# Altium PCB MainBoard.PcbDoc
Units mm, origin at the board's own origin, x right, y up, seen from the top; angles counter-clockwise.
Board outline 57.53 x 55.63 mm, 4 copper layers (Top Layer, GND, VCC, Bottom Layer), stack 0.603 mm thick; 33 components, 20 nets, 131 pads, 77 vias.
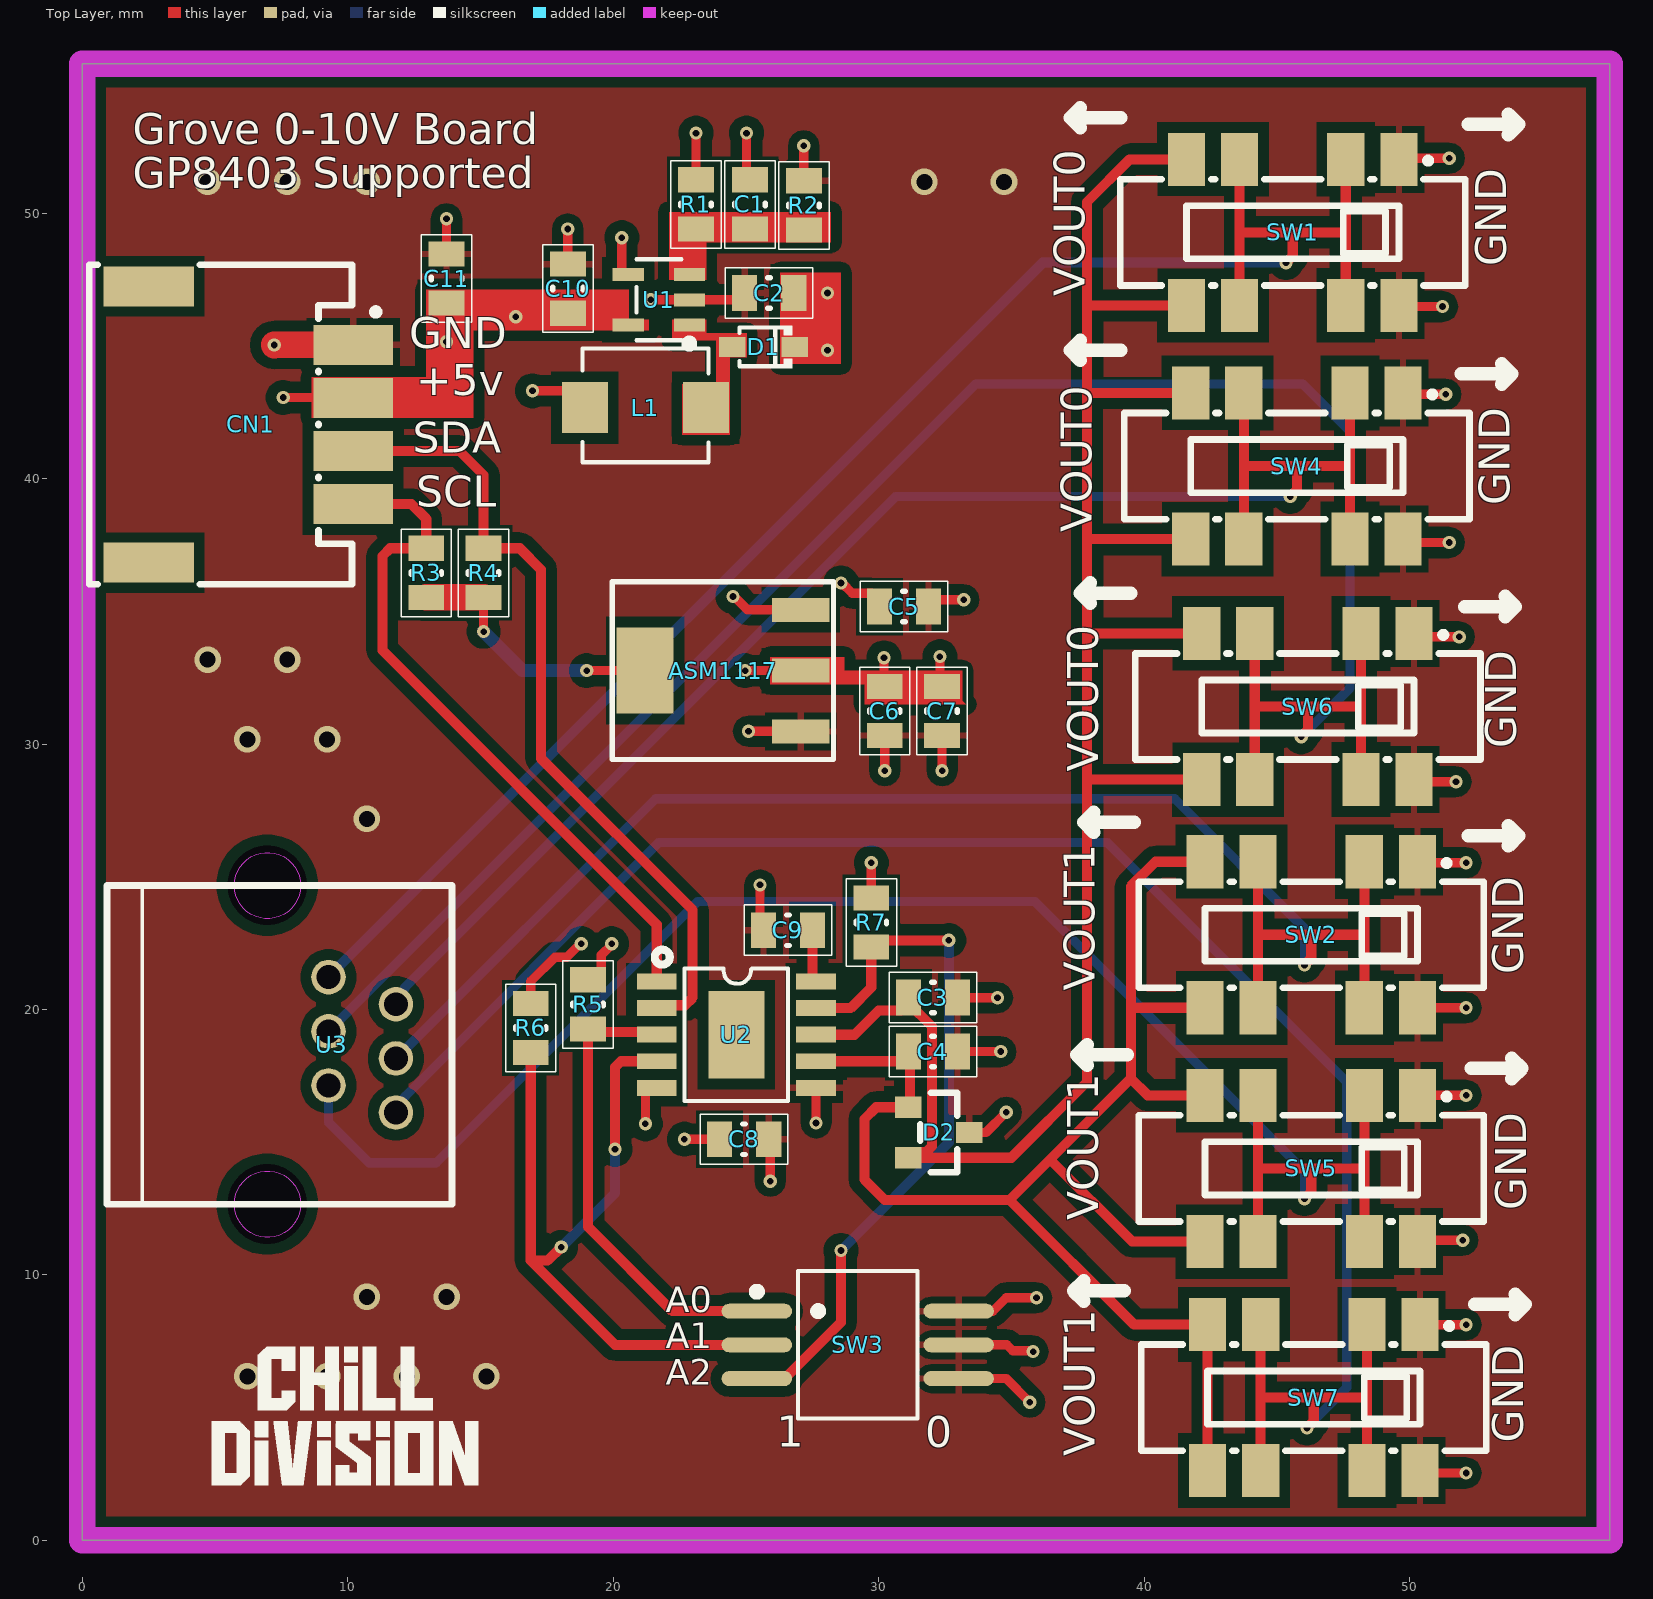
[diagram p0: Top Layer view]
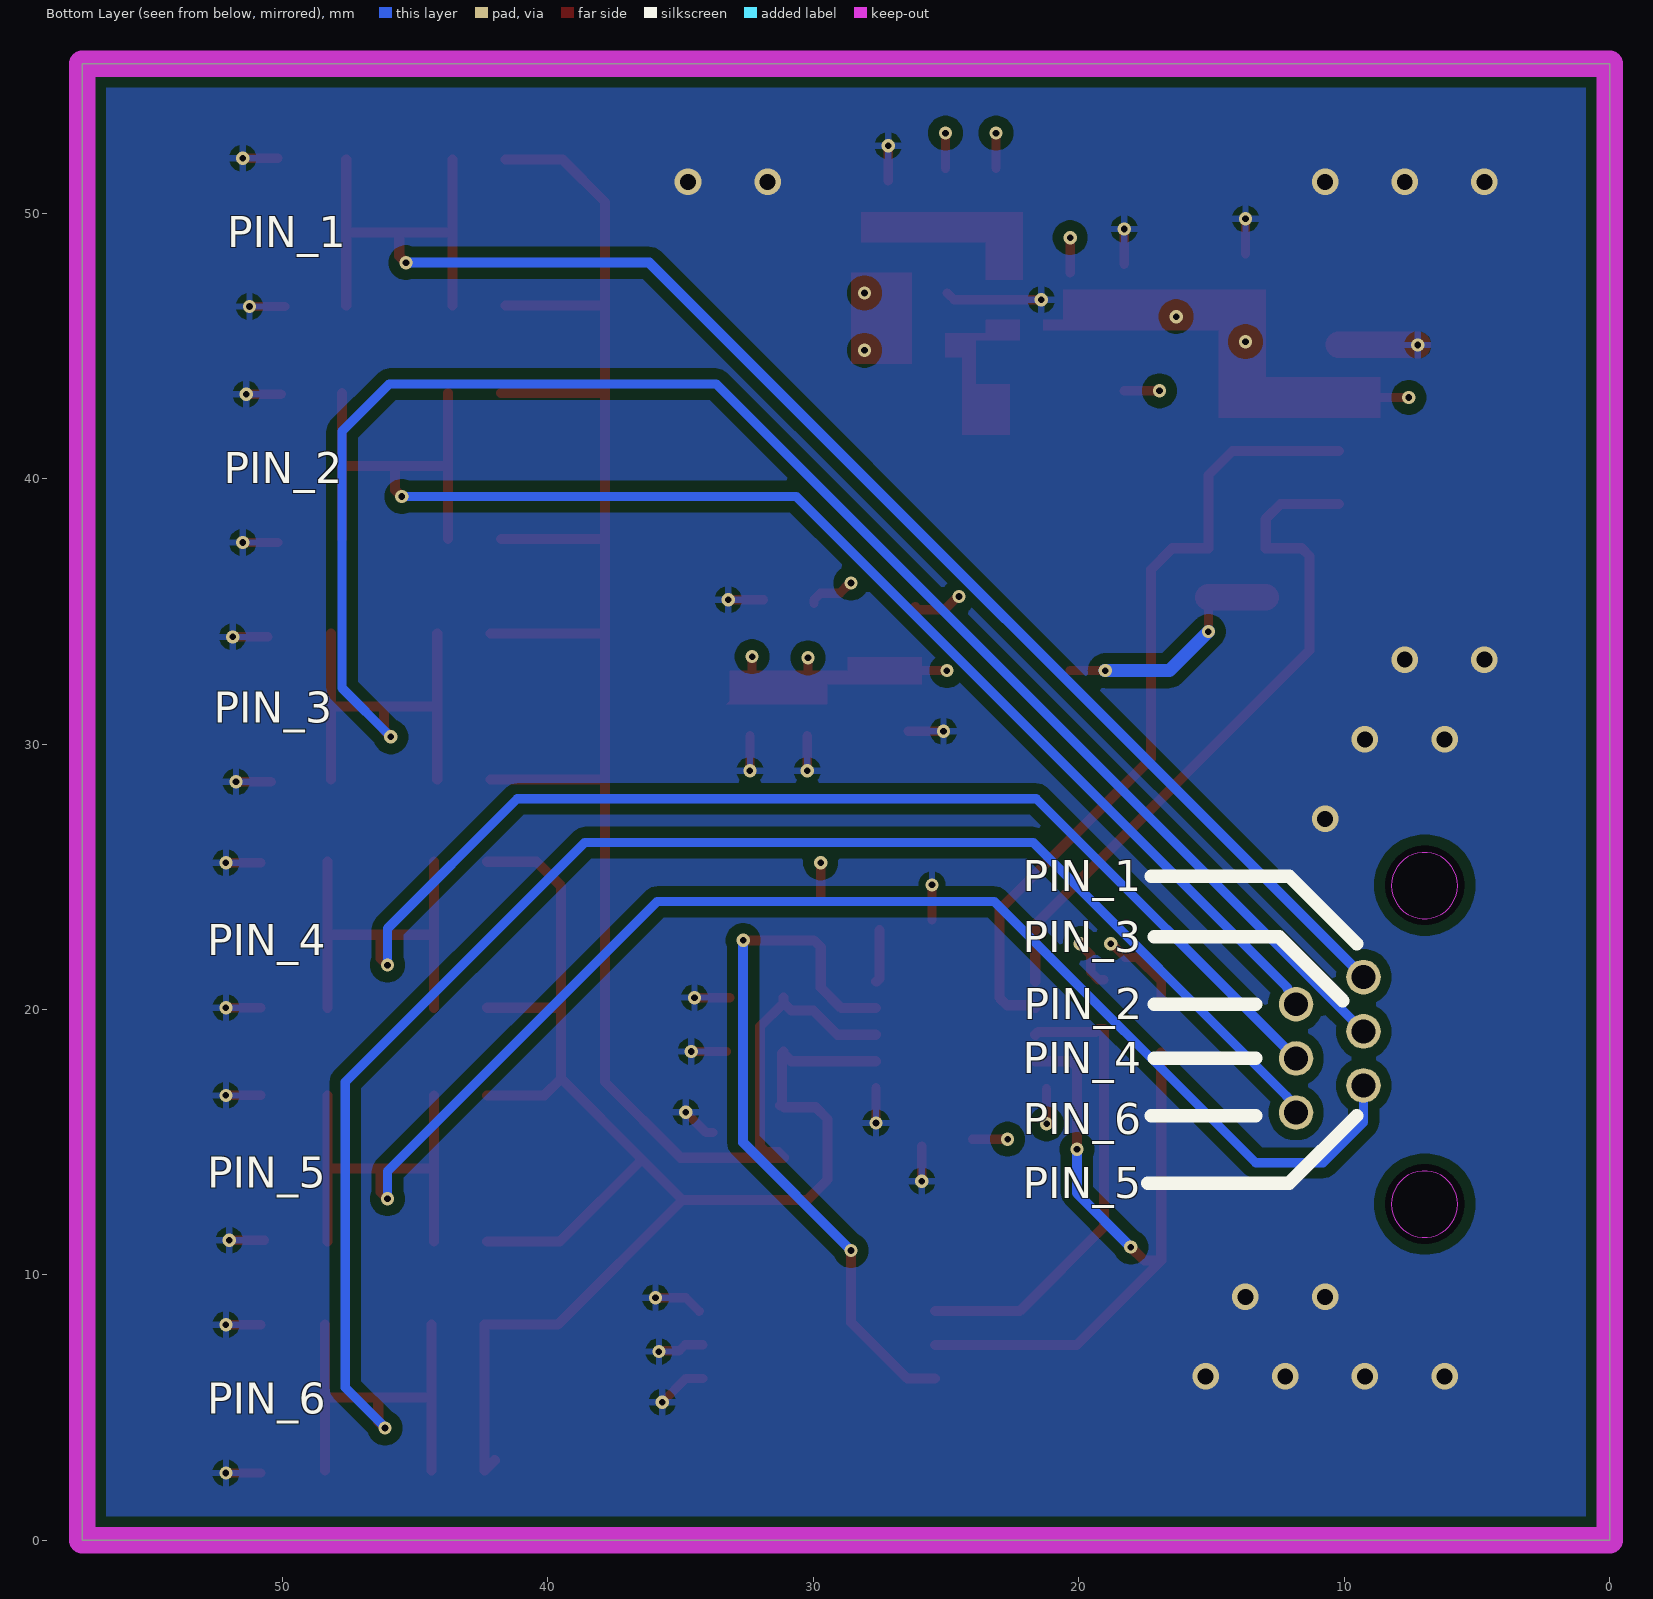
[diagram p1: Bottom Layer view, seen from below]
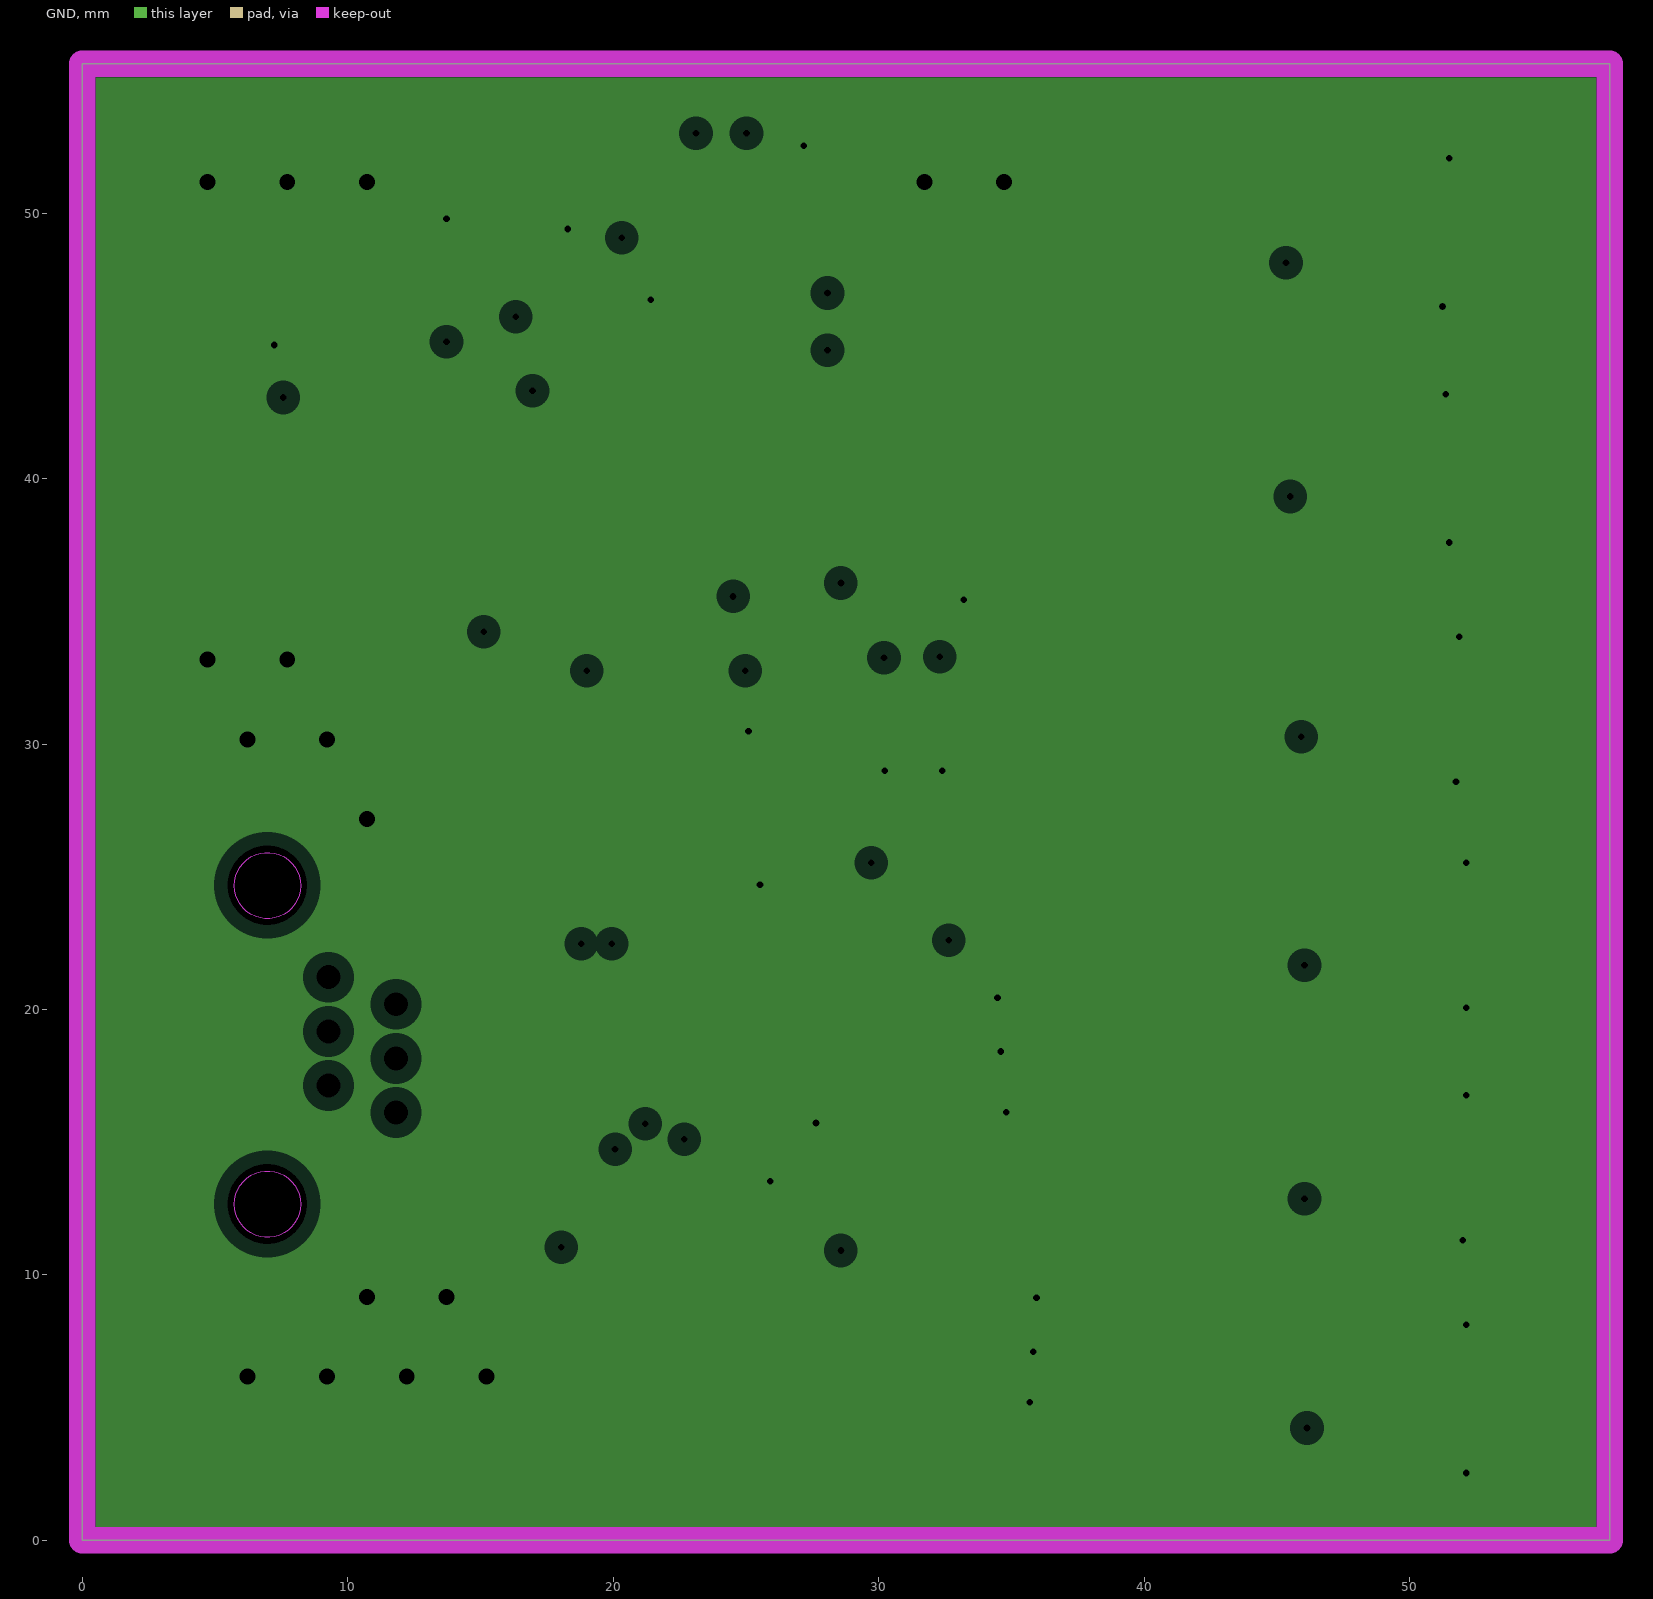
[diagram p2: GND, clearances drawn from the general rule]
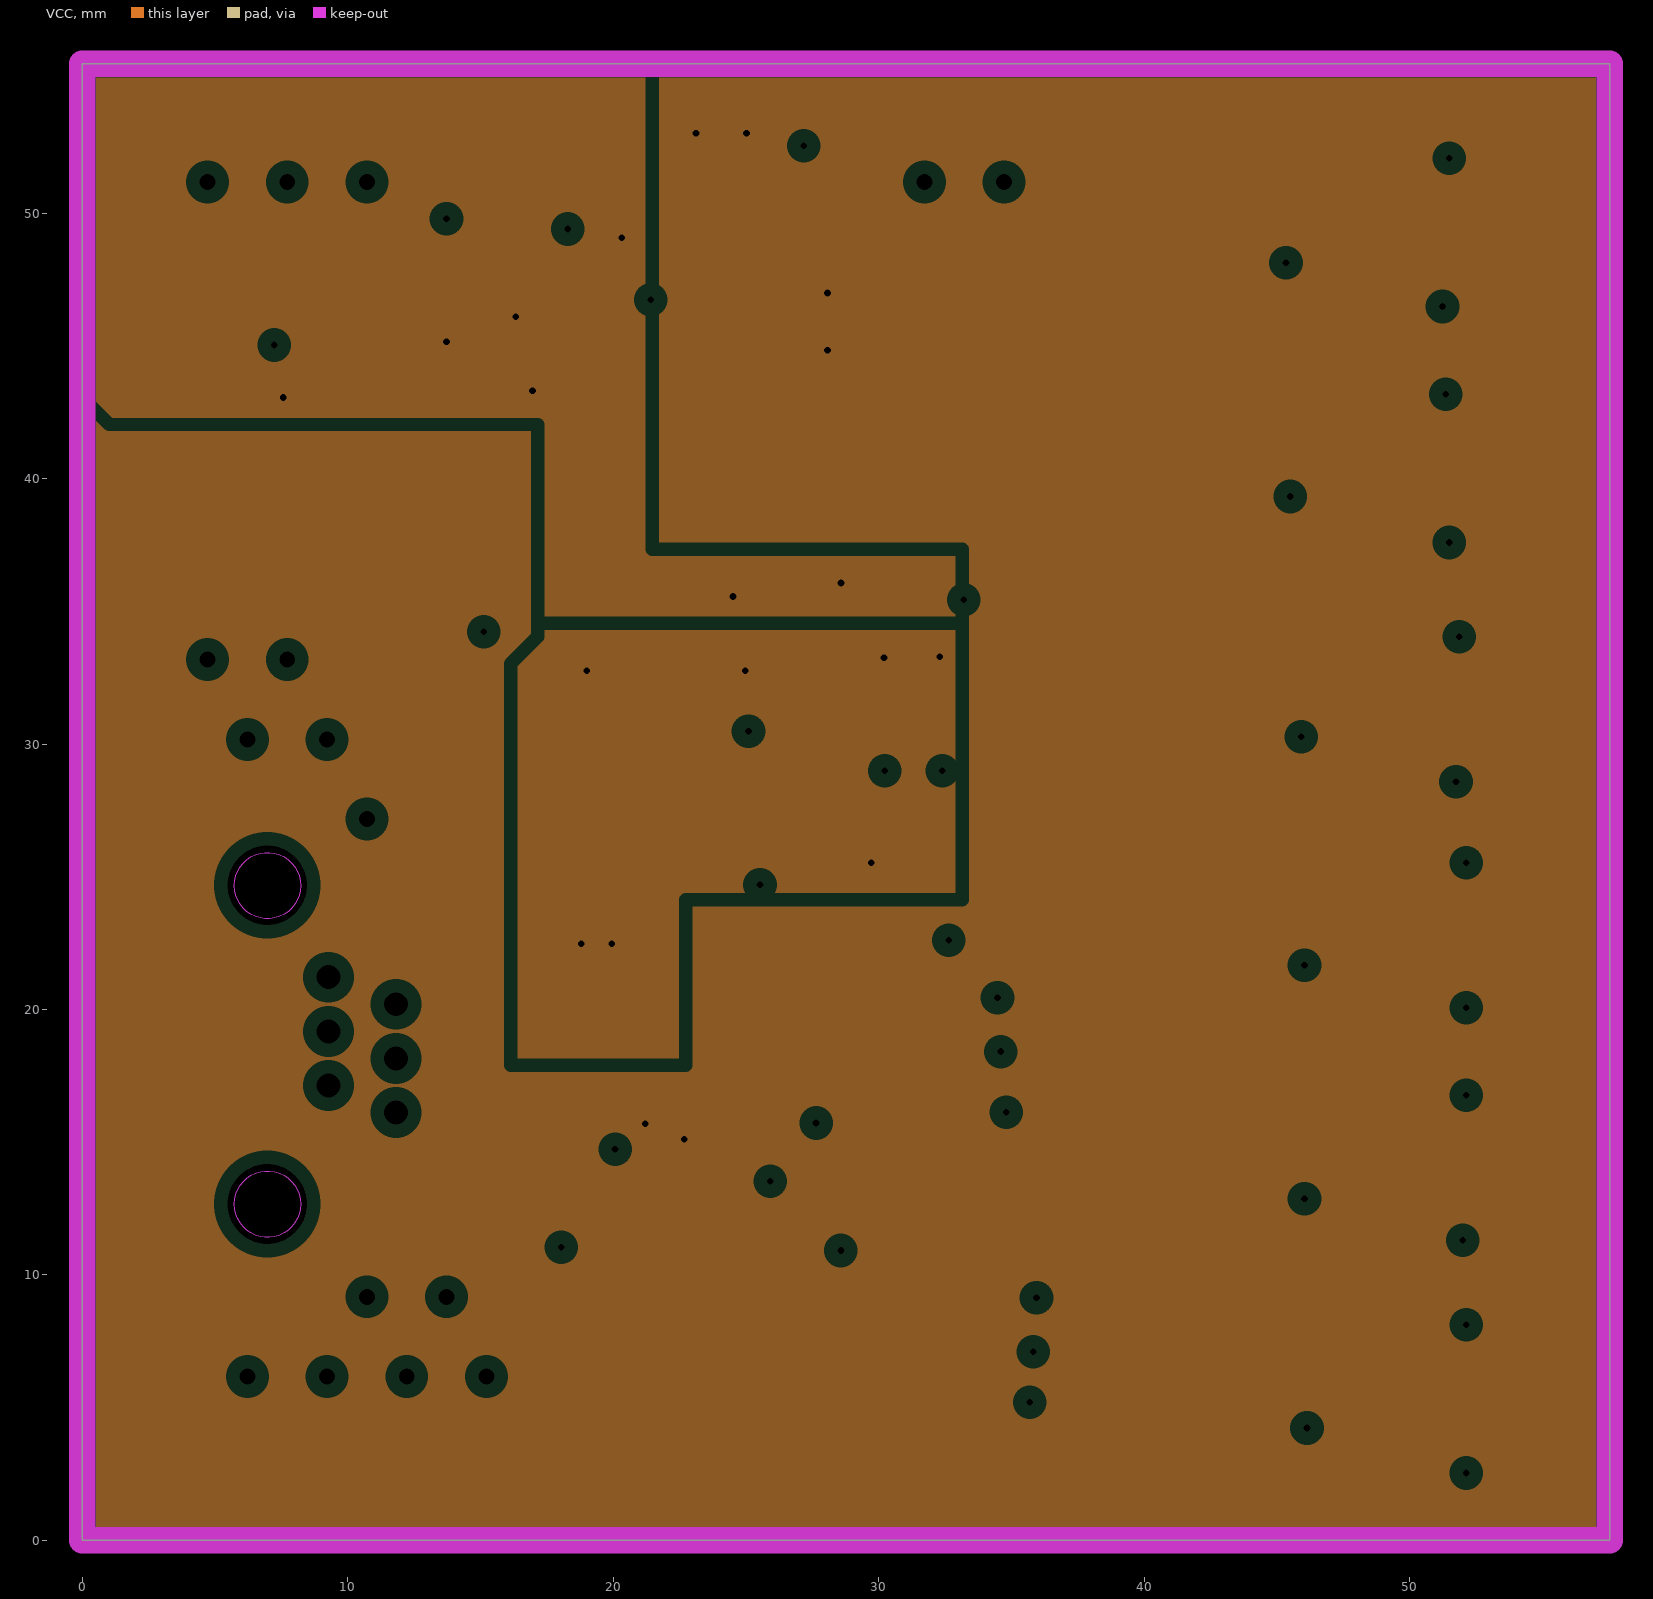
[diagram p3: VCC, clearances drawn from the general rule]

## Layer stack, top to bottom
Top Solder: solder mask 0.0102, Solder Resist, Dk 3.5
Top Layer: signal copper 0.0356
Dielectric 2: prepreg 0.0711, PP-006, Dk 4.1
GND: plane copper 0.035, net GND
Dielectric 1: dielectric 0.32, FR-4, Dk 4.8
VCC: plane copper 0.035, net (Multiple Nets)
Dielectric 3: prepreg 0.0711, PP-006, Dk 4.1
Bottom Layer: signal copper 0.0356
Bottom Solder: solder mask 0.0102, Solder Resist, Dk 3.5

## Board outline
0,0 0,55.626 57.531,55.626 57.531,0

## Design rules (kind name [scope] priority, off if disabled: settings)
Clearance [IsRegion] p1: gap=0.4 ignorepadtopadclearanceinfootprint=FALSE
ComponentClearance [All] p1: gap=0.025 collisioncheckmode=3 verticalgap=0.025 showdistances=FALSE
Height [All] p1: minheight=0.005 maxheight=127 prefheight=0.025
HoleSize [All] p1: absolutevalues=TRUE maxlimit=50.8 minlimit=0.025 maxpercent=80.000 minpercent=20.000
PlaneClearance [All] p1: clearance=0.508
PlaneConnect [All] p1: planeconnectstyle=Relief reliefexpansion=0.508 reliefentries=4 reliefconductorwidth=0.254 reliefairgap=0.254
PolygonConnect [All] p1: connectstyle=Relief reliefconductorwidth=0.254 reliefentries=4 polygonreliefangle="90 Angle" airgapwidth=0.254
RoutingVias [All] p1: holewidth=0.711 width=1.27 viastyle="Through Hole" minholewidth=0.711 minwidth=1.27 maxholewidth=0.711 maxwidth=1.27
SilkToSolderMaskClearance [IsPad] p1: minsilkscreentomaskgap=0.025 clearancetoexposedcopper=TRUE
SolderMaskExpansion [All] p1: expansion=0.102 istentingtop=FALSE
Width [All] p1: maxlimit=127 minlimit=0.254 preferedwidth=0.508
24 further rules are at their usual default settings.

## Components (designator, comment, footprint, x,y, rotation, side; value= is the part's Value field where it differs from the comment)
ASM1117 "AMS1117 - 3.3V Reg" SOT229P700X180-4N 24.13,32.766 r180 top
C1 "22pF/50V" CAPC2012X08N 27.305,49.947 r90 top
C2 "22uF/25V" CAPC2012X08N 25.491,44.831 r0 top
C3 "10uF/25V" CAPC2012X08N 32.421,22.606 r180 top
C4 "10uF/25V" CAPC2012X08N 32.421,20.574 r180 top
C5 "10uF/25V" CAPC2012X08N 31.333,37.338 r180 top
C6 "10uF/25V" CAPC2012X08N 32.385,30.861 r90 top
C7 "22uF/25V" CAPC2012X08N 34.544,30.861 r90 top
C8 "100nF/50V" CAPC2012X08N 25.309,17.272 r180 top
C9 "1uF/50V" CAPC2012X08N 26.198,20.828 r0 top
C10 "22uF/25V" CAPC2012X08N 16.129,47.534 r270 top
C11 "22uF/25V" CAPC2012X08N 11.557,47.915 r270 top
CN1 "ZX-HY2.0-4PWT" CONN-SMD_4P-P2.00_ZX-HY2.0-4PWT 6.35,42.037 r270 top
D1 "1N5819WS" SOD-323_L1.8-W1.3-LS2.5-RD 25.654,44.958 r180 top
D2 "TVS" SOT-23_L2.9-W1.3-P1.90-LS2.4-BR 32.258,15.367 r180 top
L1 "10uH" IND-SMD_L4.5-W4.5_SMMS0420 21.209,42.672 r180 top
R1 "1M" RESC2012X07N 23.114,50.328 r90 top
R2 "115K" RESC2012X07N 27.178,50.292 r270 top
R3 "10K" RESC2012X07N 12.954,36.449 r270 top
R4 "10K" RESC2012X07N 15.113,36.449 r270 top
R5 "10K" RESC2012X07N 19.05,20.193 r90 top
R6 "10K" RESC2012X07N 16.891,19.304 r90 top
R7 "10K" RESC2012X07N 29.718,23.277 r90 top
SW1 "MST23D19G2" SW-SMD_MST23D19G2 45.593,49.276 r180 top
SW2 "MST23D19G2" SW-SMD_MST23D19G2 46.291,22.816 r180 top
SW3 "DSHP03TS-S" SW-SMD_DSHP03TS-S 29.21,7.366 r270 top
SW4 "MST23D19G2" SW-SMD_MST23D19G2 45.752,40.469 r180 top
SW5 "MST23D19G2" SW-SMD_MST23D19G2 46.292,14.014 r180 top
SW6 "MST23D19G2" SW-SMD_MST23D19G2 46.164,31.413 r180 top
SW7 "MST23D19G2" SW-SMD_MST23D19G2 46.387,5.378 r180 top
U1 "TPS61040DBVR" SOT-23-5_L3.0-W1.7-P0.95-LS2.8-BL 21.717,46.736 r90 top
U2 "GP8403-TC50-EW" ESSOP-10_L4.9-W3.9-P1.00-LS6.0-BL-EP 24.638,19.05 r270 top
U3 "DS1133-S60BPX" RJ11-TH_DS1133-S60BPX 10.541,18.667 r0 top

## Footprints (in the part's own frame and the unit in brackets; to place one, negate y for a bottom-side part, rotate by r counter-clockwise, add the part's x,y. Pads: shape width x height; smd on the part's side, far side on the other; paste and mask are expansions set on the pad)
CAPC2012X08N [mm] "Chip Capacitor, 2-Leads, Body 2.00x1.25mm, IPC Medium Density"
  rect 0.95x1.35 smd: 1(-0.544,2.159) 2(1.306,2.159)
  silkscreen extent -1.27,1.21 2.03,3.11, body extent -0.76,1.38 1.39,2.93, height 0.78
CONN-SMD_4P-P2.00_ZX-HY2.0-4PWT [mm]
  rect 1.5x3 smd: 1(-3,3.85) 2(-1,3.85) 3(1,3.85) 4(3,3.85)
  rect 1.5x3.4 smd: 5(5.2,-3.85) 6(-5.2,-3.85)
  silkscreen extent -6.02,-6.1 6.02,4.83, body extent -5.97,-5.36 6.03,4.64, height 5.1
ESSOP-10_L4.9-W3.9-P1.00-LS6.0-BL-EP [mm]
  rect 0.6x1.5 smd paste+0 mask+0.05: 1(-2,-3) 2(-1,-3) 3(0,-3) 4(1,-3) 5(2,-3) 6(2,3) 7(1,3) 8(0,3) 9(-1,3) 10(-2,3)
  rect 3.3x2.1 smd paste+0 mask+0.05: 11(0,0)
  silkscreen extent -3.2,-3.08 2.5,1.95, body extent -2.44,-3 2.46,3.15, height 1.4
IND-SMD_L4.5-W4.5_SMMS0420 [mm]
  rect 1.724x1.92 smd: 1(2.278,0) 2(-2.278,0)
  silkscreen extent -2.38,-2.23 2.38,2.06, body extent -2.28,-2.11 2.17,1.95, height 1.8
RESC2012X07N [mm] "Chip Resistor, 2-Leads, Body 2.00x1.25mm, IPC Medium Density"
  rect 0.95x1.35 smd: 1(-0.925,0) 2(0.925,0)
  silkscreen extent -1.65,-0.95 1.65,0.95, body extent -1.05,-0.67 1.05,0.67, height 0.65
RJ11-TH_DS1133-S60BPX [mm]
  round 1.3 hole 0.9: 1(1.27,-2.55) 2(-1.27,-1.53) 3(1.27,-0.51) 4(-1.27,0.51) 5(1.27,1.53) 6(-1.27,2.55)
  round 1.3 hole 3: ""(-3.581,-5.994) ""(-3.581,6.02)
  Keep-Out Layer board cut-out: -2.32,-6 -2.444,-6.542 -2.791,-6.977 -3.292,-7.219 -3.848,-7.219 -4.349,-6.977 -4.696,-6.542 -4.82,-6 -4.82,-6 -4.696,-5.458 -4.349,-5.023 -3.848,-4.781 -3.292,-4.781 -2.791,-5.023 -2.444,-5.458 -2.32,-6
  Keep-Out Layer board cut-out: -2.32,6 -2.444,5.458 -2.791,5.023 -3.292,4.781 -3.848,4.781 -4.349,5.023 -4.696,5.458 -4.82,6 -4.82,6 -4.696,6.542 -4.349,6.977 -3.848,7.219 -3.292,7.219 -2.791,6.977 -2.444,6.542 -2.32,6
  silkscreen extent -9.62,-6 3.38,6, body extent -9.92,-6.4 4.28,6.4, height 14.75
SOD-323_L1.8-W1.3-LS2.5-RD [mm]
  rect 1x0.75 smd: 1(-1.173,0) 2(1.173,0)
  silkscreen extent -1.08,-0.8 0.9,0.8, body extent -1.25,-0.7 1.35,0.65, height 1.1
SOT229P700X180-4N [mm] "SOT223, 4-Leads, Body 6.50x7.00mm (avg), Pitch 2.29mm, IPC Medium Density"
  rect 2.15x0.9 smd: GND(-2.93,2.29) Vin(-2.93,-2.29) Vout(-2.93,0)
  rect 2.15x3.25 smd: Vout(2.93,0)
  silkscreen extent -4.17,-3.35 4.17,3.35, body extent -3.55,-3.28 3.45,3.22, height 1.85
SOT-23-5_L3.0-W1.7-P0.95-LS2.8-BL [mm]
  rect 0.49x1.157 smd: 1(-0.95,-1.154) 2(0,-1.154) 3(0.95,-1.154)
  rect 0.49x1.175 smd: 4(0.95,1.154) 5(-0.95,1.154)
  silkscreen extent -1.8,-1.29 1.53,0.85, body extent -1.47,-1.17 1.53,1.33, height 1.1
SOT-23_L2.9-W1.3-P1.90-LS2.4-BR [mm]
  rect 1x0.8 smd paste+0 mask+0.051: 1(1.15,-0.95) 2(1.15,0.95) 3(-1.15,0)
  silkscreen extent -0.7,-1.5 0.7,1.5, body extent -1.25,-1.47 1.25,1.53, height 1.05
SW-SMD_DSHP03TS-S [mm]
  oval 0.56x2.655 smd: 1(-1.27,-3.803) 2(0,-3.803) 3(1.27,-3.803) 4(1.27,3.803) 5(0,3.803) 6(-1.27,3.803)
  silkscreen extent -2.78,-3.95 2.78,2.25, body extent -2.69,-4.3 2.72,4.2, height 2.4
SW-SMD_MST23D19G2 [mm]
  rect 1.4x2 smd: 1(-4,-2.75) 2(-2,-2.75) 3(2,-2.75) 4(4,-2.75) 5(4,2.75) 6(2,2.75) 7(-2,2.75) 8(-4,2.75)
  silkscreen extent -6.5,-2.8 6.5,2, body extent -4.92,-3.35 5.07,2.65, height 3.51

## Part data
ASM1117: "C6186", Created By=NourAldin
C1: library part "0805 capacitor", "C105623", CreatedBy=NourAldin, Datasheet=https://eu.mouser.com/datasheet/2/212/KEM_C1090_X7R_ESD-1103328.pdf, Mouser Link=https://eu.mouser.com/ProductDetail/KEMET/C0805C102MAREC7210?qs=sGAEpiMZZMs0AnBnWHyRQN7%2fAA2D2lPPn4aJ8HP1TBffR9FQG0oqCQ%3d%3d
C2 C7 C10 C11: library part "0805 capacitor", "C602037", CreatedBy=NourAldin, Datasheet=https://eu.mouser.com/datasheet/2/212/KEM_C1090_X7R_ESD-1103328.pdf, Mouser Link=https://eu.mouser.com/ProductDetail/KEMET/C0805C102MAREC7210?qs=sGAEpiMZZMs0AnBnWHyRQN7%2fAA2D2lPPn4aJ8HP1TBffR9FQG0oqCQ%3d%3d
C3 C4 C5 C6: library part "0805 capacitor", "C15850", CreatedBy=NourAldin, Datasheet=https://eu.mouser.com/datasheet/2/212/KEM_C1090_X7R_ESD-1103328.pdf, Mouser Link=https://eu.mouser.com/ProductDetail/KEMET/C0805C102MAREC7210?qs=sGAEpiMZZMs0AnBnWHyRQN7%2fAA2D2lPPn4aJ8HP1TBffR9FQG0oqCQ%3d%3d
C8: library part "0805 capacitor", "C49678", CreatedBy=NourAldin, Datasheet=https://eu.mouser.com/datasheet/2/212/KEM_C1090_X7R_ESD-1103328.pdf, Mouser Link=https://eu.mouser.com/ProductDetail/KEMET/C0805C102MAREC7210?qs=sGAEpiMZZMs0AnBnWHyRQN7%2fAA2D2lPPn4aJ8HP1TBffR9FQG0oqCQ%3d%3d
C9: library part "0805 capacitor", "C28323", CreatedBy=NourAldin, Datasheet=https://eu.mouser.com/datasheet/2/212/KEM_C1090_X7R_ESD-1103328.pdf, Mouser Link=https://eu.mouser.com/ProductDetail/KEMET/C0805C102MAREC7210?qs=sGAEpiMZZMs0AnBnWHyRQN7%2fAA2D2lPPn4aJ8HP1TBffR9FQG0oqCQ%3d%3d
CN1: "C7429571", Color=Beige, Current Rating=2A, Flame Retardant Rating=-, JLCPCB Part Class="Extended Part", LCSC Part Name="1x4P 间距:2mm 卧贴 系列:HY", Manufacturer=Megastar(兆星), Operating Temperature=-25℃~+85℃, Add into BOM=yes, Contact Material=Brass, Contact Plating=Tin, Convert to PCB=yes, Datasheet=https://item.szlcsc.com/datasheet/ZX-HY2.0-4PWT/8427488.html, Device=ZX-HY2.0-4PWT, Manufacturer Part=ZX-HY2.0-4PWT, Mounting Type="Surface Mount, Right Angle", Number of Pins=4P, Number of PINs Per Row=4, Number of Rows=1, Pins Structure=1x4P, Pitch=2mm, Plastic Material=-, Reference Series=HY, Row Spacing=-, Supplementary Features="Auxiliary Solder Pin", Supplier=LCSC, Supplier Footprint=SMD,P=2mm,卧贴, Supplier Part=C7429571, Symbol=ZX-HY2.0-4PWT, Voltage Rating=-, X-Length of Bottom Edge on Board (Spacing Line)=12mm, Y-Width of Bottom Edge on Board=10.5mm, Z-Height of the Board=5.2mm
D1: library part 1N5819WS_C191023, "C191023", Current - Rectified=1A, JLCPCB Part Class="Basic Part", LCSC Part Name="电压:40V 电流:1A", Manufacturer=Hottech(合科泰), Non-Repetitive Peak Forward Surge Current=25A, Voltage - DC Reverse(Vr)=40V, Voltage - Forward(Vf@If)=600mV@1A, Add into BOM=yes, Convert to PCB=yes, Datasheet=https://item.szlcsc.com/datasheet/1N5819WS/213850.html, Device=1N5819WS_C191023, Manufacturer Part=1N5819WS, Supplier=LCSC, Supplier Footprint=SOD-323, Supplier Part=C191023, Symbol=1N5819WS
D2: library part "TVS 2 Channel", "C2892527", Breakdown Voltage=13.3V；7.5V, JLCPCB Part Class="Extended Part", LCSC Part Name=SM712-02HTG, Manufacturer=Littelfuse(美国力特), Maximum Clamping Voltage=31V；19V, Peak Pulse Current (Ipp)@10/1000us=19A@8/20us, Peak Pulse Power Dissipation (Ppp)@10/1000us=600W, Reverse Stand-Off Voltage (Vrwm)=12V@Max；7V@Max, Add into BOM=yes, Convert to PCB=yes, Datasheet=https://atta.szlcsc.com/upload/public/pdf/source/20180725/C172881_EAAF30934B5110668A16259EFFDDCCE9.pdf, Device=SM712-02HTG_C172881, Manufacturer Part=SM712-02HTG, polarity=Bi-Directional, Supplier=LCSC, Supplier Footprint=SOT-23, Supplier Part=C172881, Symbol=SM712-02HTG, Type=TVS
L1: library part SMMS0420-100M, "C133195", Current - Saturation(Isat)=2A, Current Rating=1.6A, DC Resistance(DCR)=258mΩ, JLCPCB Part Class="Extended Part", LCSC Part Name="10uH ±20% 2A", Manufacturer=SXN(顺翔诺), Tolerance=±20%, Add into BOM=yes, Convert to PCB=yes, Datasheet=https://item.szlcsc.com/datasheet/SMMS0420-100M/144499.html, Device=SMMS0420-100M, Manufacturer Part=SMMS0420-100M, Supplier=LCSC, Supplier Footprint=SMD,4.6x4.2mm, Supplier Part=C133195, Symbol=SMMS0420-100M, Type=-
R1: library part "0805 Resistor", "C107700", Created By=NourAldin, Datasheet=https://eu.mouser.com/datasheet/2/348/ktr-e-1139187.pdf, Mouser Link=https://eu.mouser.com/ProductDetail/ROHM-Semiconductor/KTR10EZPF3921?qs=493kPxzlxfJ9hgmf1BrSoQ%3d%3d
R2: library part "0805 Resistor", "C2933289", Created By=NourAldin, Datasheet=https://eu.mouser.com/datasheet/2/348/ktr-e-1139187.pdf, Mouser Link=https://eu.mouser.com/ProductDetail/ROHM-Semiconductor/KTR10EZPF3921?qs=493kPxzlxfJ9hgmf1BrSoQ%3d%3d
R3 R4 R5 R6 R7: library part "0805 Resistor", "C84376", Created By=NourAldin, Datasheet=https://eu.mouser.com/datasheet/2/348/ktr-e-1139187.pdf, Mouser Link=https://eu.mouser.com/ProductDetail/ROHM-Semiconductor/KTR10EZPF3921?qs=493kPxzlxfJ9hgmf1BrSoQ%3d%3d
SW1 SW2 SW4 SW5 SW6 SW7: "C431545", Actuator Color=-, Current Rating (DC)=100mA, JLCPCB Part Class="Extended Part", LCSC Part Name="三档立式贴片 8脚拨动 柄长2.0MM", Manufacturer="SHOU HAN(首韩)", Operating Temperature=-25℃~+70℃, Voltage Rating (DC)=12V, Actuator Style=-, Add into BOM=yes, Circuit=双刀三掷, Convert to PCB=yes, Current Rating (AC)=-, Datasheet=https://atta.szlcsc.com/upload/public/pdf/source/20190925/C431545_A88710AC241B275593C257CF6D595AD7.pdf, Device=MST23D19G2, Manufacturer Part=MST23D19G2, Mechanical Life=1万次, Mounting Style="Brick nogging", Pin Style=SMDSplicing, Supplier=LCSC, Supplier Footprint=SMD, Supplier Part=C431545, Switch Height=3.5mm, Switch Length=12.95mm, Switch Width=3.55mm, Symbol=MST23D19G2, Voltage Rating (AC)=-
SW3: "C319051", Color=Black, Current Rating=25mA, JLCPCB Part Class="Extended Part", LCSC Part Name="间距1.27mm 平拨,凹槽式 3位拨码开关", Manufacturer="XKB Connection(中国星坤)", Operating Life="3,000 Cycles", Operating Temperature=-20℃~+70℃, Voltage Rating=24V, Add into BOM=yes, Circuit=SPST, Convert to PCB=yes, Datasheet=https://item.szlcsc.com/datasheet/DSHP03TS-S/300143.html, Device=DSHP03TS-S, Lead Pitch=1.27mm, Manufacturer Part=DSHP03TS-S, Number of Positions=3, Supplier=LCSC, Supplier Footprint=SMD-6P,5.4x5.4mm, Supplier Part=C319051, Symbol=DSHP03TS-S, Termination Style="Gull Wing", Type="Slide, Recessed"
U1: "C7722", Input Voltage=1.8V~6V, JLCPCB Part Class="Extended Part", LCSC Part Name=低功耗DC/DC升压转换器, Manufacturer=TI(德州仪器), Operating Temperature=-40℃~+85℃, Output Current=400mA, Output Voltage=28V, Quiescent Current (Iq)=28uA, Switching Frequency=1MHz, Add into BOM=yes, Convert to PCB=yes, Datasheet=https://www.ti.com/cn/lit/gpn/tps61040, Device=TPS61040DBVR, Function="Boost type", Manufacturer Part=TPS61040DBVR, Number of Outputs=1, Output Type=Adjustable, Supplier=LCSC, Supplier Footprint=SOT-23-5, Supplier Part=C7722, Switch tube (built-in/external)=Built-in, Symbol=TPS61040DBVR, Synchronous Rectification=No, Topology=Boost
U2: "C3152007", JLCPCB Part Class="Extended Part", LCSC Part Name="双路0-10V (0.1%)", Manufacturer=Guestgood(客益), Add into BOM=yes, Convert to PCB=yes, Datasheet=https://item.szlcsc.com/datasheet/GP8403-TC50-EW/3713796.html, Device=GP8403-TC50-EW, Manufacturer Part=GP8403-TC50-EW, Supplier=LCSC, Supplier Footprint=ESSOP-10-150mil, Supplier Part=C3152007, Symbol=GP8403-TC50-EW_C3152007
U3: "C77859", JLCPCB Part Class="Extended Part", Manufacturer=CONNFLY, Ratings=-, Add into BOM=yes, Connector Type="RJ12 Jack", Convert to PCB=yes, Datasheet=https://item.szlcsc.com/datasheet/DS1133-S60BPX/78993.html, Device=DS1133-S60BPX, LCSC Part Name=DS1133-S60BPX, LED=-, Manufacturer Part=DS1133-S60BPX, Number of Ports=1, Shielding=-, Supplier=LCSC, Supplier Footprint=插件, Supplier Part=C77859, Symbol=DS1133-S60BPX

## Via types
v1: diameter 0.5, hole 0.25, Top Layer to Bottom Layer, tented both sides, 61 vias
v2: diameter 1, hole 0.6, Top Layer to Bottom Layer, tented both sides, 16 vias

## Nets (pads, with @x,y where several pads share a name; then routed paths per layer and width w, separated by ;. In a path a pad name is that pad's centre, name@x,y a point inside that pad or via, vN(x,y) a via of type N, cw(c..) or ccw(c..) an arc to the next point about the centre after c; other vN are vias at no path point)
+3.3V: ASM1117.Vout C6.2 C7.2 R3.2 R4.2 R5.2 R6.2 R7.2 | length 19.9
  Top Layer w0.35: v1(15.113,34.235) R4.2 ; R6.2 16.891,21.062 17.801,21.971 18.248,21.971 18.755,22.479 v1(18.796,22.479) ; v1(18.995,32.766) ASM1117.Vout@20.32,32.766 ; R5.2 19.25,21.118 19.55,21.418 19.55,22.049 19.939,22.438 v1(19.939,22.479) ; v1(24.964,32.766) ASM1117.Vout@26.289,32.766 ; R7.2 v1(29.718,25.527) ; C6.2@30.198,31.924 v1(30.198,33.249) ; C7.2@32.303,31.968 v1(32.303,33.293)
  Top Layer w0.5: R3.2@12.827,35.397 R3.2
  Top Layer w1: R3.2 R4.2
  Bottom Layer w0.5: v1(15.113,34.235) 16.582,32.766 v1(18.995,32.766)
+5V: ASM1117.Vin C5.2 C10.2 C11.2 CN1.2 L1.1 U1.4 U1.5 | length 10.4
  Top Layer w0.35: v1(7.565,43.053) CN1.2@8.89,43.053 ; v1(13.716,45.157) C11.2@13.716,46.482 ; v1(16.328,46.101) C10.2@17.653,46.101 ; v1(16.955,43.307) L1.1@18.28,43.307 ; U1.4@20.32,47.752 v1(20.32,49.077) ; v1(24.511,35.56) 24.552,35.56 25.056,35.056 26.16,35.056 26.162,35.058 ASM1117.Vin@26.162,35.179 ; v1(28.575,36.068) 28.616,36.068 29.005,35.679 29.727,35.679 29.972,35.434 C5.2@29.972,35.306
+12V: C1.2 C2.2 C8.2 D1.1 R1.2 U2.5 | length 5.3
  Top Layer w0.35: v1(21.209,15.693) U2.5@21.209,17.018 ; v1(22.678,15.113) C8.2 ; R1.2@23.114,51.689 v1(23.114,53.014) ; C1.2@25.019,51.689 v1(25.019,53.014)
  other v1: 28.067,44.831 28.067,46.99
A0: R5.1 SW3.1 U2.3 | length 17.8
  Top Layer w0.381: U2.3 21.529,19.159 19.534,19.159 19.359,19.159 19.25,19.268 R5.1 19.05,11.811 22.225,8.636 SW3.1
A1: R6.1 SW3.2 U2.4 | length 28.3
  Top Layer w0.381: R6.1 16.891,10.541 ; v1(18.034,11.049) 17.526,10.541 16.891,10.541 ; v1(20.066,14.732) 20.066,17.827 20.289,18.05 U2.4 ; SW3.2 20.066,7.366 16.891,10.541
  Bottom Layer w0.381: v1(18.034,11.049) 20.066,13.081 v1(20.066,14.732)
A2: R7.1 SW3.3 U2.9 | length 27.1
  Top Layer w0.381: SW3.3 26.455,6.096 28.575,8.216 v1(28.575,10.922) ; U2.9 28.94,20.05 29.718,20.828 R7.1 29.972,22.606 v1(32.639,22.606)
  Bottom Layer w0.381: v1(28.575,10.922) 32.639,14.986 v1(32.639,22.606)
GND: ASM1117.GND C2.1 C3.1 C4.1 C5.1 C6.1 C7.1 C8.1 C9.1 C10.1 C11.1 CN1.1 D2.3 R2.1 SW1.1 SW1.8 SW2.1 SW2.8 SW3.4 SW3.5 SW3.6 SW4.1 SW4.8 SW5.1 SW5.8 SW6.1 SW6.8 SW7.1 SW7.8 U1.2 U2.6 | length 45.3
  Top Layer w0.35: C11.1 v1(13.716,49.784) ; C10.1 v1(18.288,49.403) ; v1(21.408,46.736) 24.693,46.736 C2.1 ; v1(25.091,30.48) ASM1117.GND@26.416,30.48 ; C9.1@25.527,23.368 v1(25.527,24.693) ; v1(25.908,13.534) C8.1@25.908,14.859 ; R2.1 v1(27.178,52.542) ; v1(27.638,15.725) U2.6 ; v1(30.226,28.992) C6.1 ; C5.1@31.877,35.433 v1(33.202,35.433) ; v1(32.385,28.992) C7.1 ; C3.1@33.147,20.447 v1(34.472,20.447) ; C4.1@33.274,18.415 v1(34.599,18.415) ; D2.3@33.782,15.367 34.036,15.367 v1(34.798,16.129) ; SW3.4@34.163,6.096 34.798,6.096 v1(35.687,5.207) ; SW3.5@34.163,7.366 34.819,7.366 35.045,7.141 35.785,7.141 v1(35.814,7.112) ; SW3.6@34.29,8.636 34.798,9.144 v1(35.941,9.144) ; SW1.8@49.911,46.482 v1(51.236,46.482) ; SW4.1@50.038,43.18 v1(51.363,43.18) ; SW4.8@50.165,37.592 v1(51.49,37.592) ; SW1.1@50.165,52.07 v1(51.49,52.07) ; SW6.8@50.419,28.575 v1(51.744,28.575) ; SW6.1@50.546,34.036 v1(51.871,34.036) ; SW5.8@50.673,11.303 v1(51.998,11.303) ; SW7.8@50.8,2.54 v1(52.125,2.54) ; SW7.1@50.8,8.128 v1(52.125,8.128) ; SW5.1@50.8,16.764 v1(52.125,16.764) ; SW2.8@50.8,20.066 v1(52.125,20.066) ; SW2.1@50.8,25.527 v1(52.125,25.527)
  Top Layer w1: v1(7.223,45.032) 7.228,45.037 CN1.1
  other v2: 6.218,6.177 9.218,6.177 12.218,6.177 15.218,6.177 10.718,9.177 13.718,9.177 10.718,27.177 6.218,30.177 9.218,30.177 4.718,33.177 7.718,33.177 4.718,51.177 7.718,51.177 10.718,51.177 31.718,51.177 34.718,51.177
NetC1_1: C1.1 R1.1 R2.2 U1.3
NetC9_2: C9.2 U2.10 | length 2
  Top Layer w0.381: C9.2 27.504,21.159 27.613,21.05 U2.10
NetD1_2: D1.2 L1.2 U1.1
PIN_1: SW1.2 SW1.3 SW1.6 SW1.7 U3.6 | length 63.5
  Top Layer w0.381: SW1.6 43.593,49.276 ; SW1.3 43.593,49.276 ; v1(45.339,48.133) 45.593,48.387 45.593,49.276 ; SW1.7 47.593,49.276 ; SW1.2 47.593,49.276 ; 43.593,49.276 45.593,49.276 ; 45.593,49.276 47.593,49.276
  Bottom Layer w0.381: U3.6 9.271,21.23 36.174,48.133 v1(45.339,48.133)
PIN_2: SW4.2 SW4.3 SW4.6 SW4.7 U3.5 | length 58
  Top Layer w0.381: SW4.6 43.752,40.469 ; SW4.3 43.752,40.469 ; v1(45.498,39.326) 45.752,39.58 45.752,40.469 ; SW4.7 47.752,40.469 ; SW4.2 47.752,40.469 ; 43.752,40.469 45.752,40.469 ; 45.752,40.469 47.752,40.469
  Bottom Layer w0.35: U3.5 11.811,20.454 12.14,20.783 12.14,20.83 30.635,39.326 v1(45.498,39.326)
PIN_3: SW6.2 SW6.3 SW6.6 SW6.7 U3.4 | length 77.8
  Top Layer w0.381: SW6.6 44.164,31.413 ; SW6.3 44.164,31.413 ; v1(45.91,30.27) 46.164,30.524 46.164,31.413 ; SW6.7 48.164,31.413 ; SW6.2 48.164,31.413 ; 44.164,31.413 46.164,31.413 ; 46.164,31.413 48.164,31.413
  Bottom Layer w0.35: U3.4 33.655,43.561 45.974,43.561 47.752,41.783 47.752,32.112 v1(45.91,30.27)
PIN_4: SW2.2 SW2.3 SW2.6 SW2.7 U3.3 | length 57.9
  Top Layer w0.381: SW2.6 44.291,22.816 ; SW2.3 44.291,22.816 ; v1(46.037,21.673) 46.291,21.927 46.291,22.816 ; SW2.7 48.291,22.816 ; SW2.2 48.291,22.816 ; 44.291,22.816 46.291,22.816 ; 46.291,22.816 48.291,22.816
  Bottom Layer w0.35: U3.3 21.594,27.94 41.148,27.94 46.037,23.051 v1(46.037,21.673)
PIN_5: SW5.2 SW5.3 SW5.6 SW5.7 U3.2 | length 64.4
  Top Layer w0.381: SW5.6 44.292,14.014 ; SW5.3 44.292,14.014 ; v1(46.038,12.871) 46.292,13.125 46.292,14.014 ; SW5.7 48.292,14.014 ; SW5.2 48.292,14.014 ; 44.292,14.014 46.292,14.014 ; 46.292,14.014 48.292,14.014
  Bottom Layer w0.35: U3.2 9.271,15.748 10.795,14.224 13.335,14.224 23.176,24.065 35.879,24.065 46.038,13.906 v1(46.038,12.871)
PIN_6: SW7.2 SW7.3 SW7.6 SW7.7 U3.1 | length 73.8
  Top Layer w0.381: SW7.6 44.387,5.378 ; SW7.3 44.387,5.378 ; v1(46.133,4.235) 46.387,4.489 46.387,5.378 ; SW7.7 48.387,5.378 ; SW7.2 48.387,5.378 ; 44.387,5.378 46.387,5.378 ; 46.387,5.378 48.387,5.378
  Bottom Layer w0.35: U3.1 11.811,16.374 12.159,16.722 12.159,16.731 21.717,26.289 38.608,26.289 47.625,17.272 47.625,5.757 46.133,4.265 v1(46.133,4.235)
SCL: CN1.4 R3.1 U2.1 | length 26.2
  Top Layer w0.381: CN1.4 12.398,39.037 12.954,38.481 R3.1 11.593,37.374 11.303,37.084 11.303,33.528 21.638,23.193 U2.1
SDA: CN1.3 R4.1 U2.2 | length 30.5
  Top Layer w0.381: CN1.3 14.208,41.037 15.113,40.132 R4.1 16.474,37.374 17.272,36.576 17.272,29.464 22.987,23.749 22.987,20.447 22.699,20.159 21.747,20.159 U2.2
VOUT0: C3.2 D2.2 SW1.4 SW1.5 SW4.4 SW4.5 SW6.4 SW6.5 U2.8 | length 76.8
  Top Layer w0.381: U2.8 29.083,19.05 29.996,19.963 30.83,19.963 C3.2@31.115,20.247 ; C3.2 C3.2@31.115,20.247 ; SW1.5 37.89,46.526 37.846,46.482 ; SW1.4 39.453,52.026 37.846,50.419 37.846,46.482 ; SW4.5 37.846,37.719 ; SW4.4 37.934,43.219 37.846,43.307 ; SW6.5 37.885,28.663 37.846,28.702 ; SW6.4 37.846,34.163 ; C3.2@31.115,20.247 32.002,19.36 32.002,14.85 31.779,14.626 31.317,14.626 D2.2 34.991,14.417 37.846,17.272 37.846,28.702 ; 37.846,28.702 37.846,34.163 ; 37.846,34.163 37.846,37.719 ; 37.846,37.719 37.846,43.307 ; 37.846,43.307 37.846,46.482
VOUT1: C4.2 D2.1 SW2.4 SW2.5 SW5.4 SW5.5 SW7.4 SW7.5 U2.7 | length 61
  Top Layer w0.381: U2.7 30.83,18.05 31.115,18.335 C4.2 31.178,18.351 31.178,16.447 D2.1@31.242,16.383 ; D2.1 29.906,16.317 29.464,15.875 29.464,13.589 30.226,12.827 34.925,12.827 ; SW7.5@41.998,3.018 SW7.5 SW7.4 39.624,8.128 34.925,12.827 ; SW2.5 39.497,20.066 ; SW2.4 40.425,25.566 39.497,24.638 39.497,20.066 ; SW5.5 39.536,11.264 36.449,14.351 ; SW5.4 40.132,16.764 39.497,17.399 ; 34.925,12.827 36.449,14.351 ; 36.449,14.351 39.497,17.399 ; 39.497,17.399 39.497,20.066
pads on no net: CN1.5 CN1.6 U2.11 U3.

## Polygon pours and split planes (outlines as drawn)
GND on Bottom Layer "NONET_L-01_P-001" (solid, pour order 1): 0,55.626 57.531,55.626 57.531,0 0,0
GND on Top Layer "NONET_L-01_P-001" (solid, pour order 0): 0,55.626 57.531,55.626 57.531,0 0,0
+12V on VCC (split plane): 57.021,0.51 0.51,0.51 0.51,42.18 0.835,41.856 0.888,41.815 0.932,41.797 0.95,41.79 1.016,41.781 16.889,41.781 16.889,34.544 16.889,34.142 15.948,33.201 15.907,33.148 15.882,33.086 15.873,33.02 15.873,17.907 15.882,17.841 15.907,17.779 15.948,17.726 16.001,17.685 16.063,17.66 16.129,17.651 22.733,17.651 22.799,17.66 22.861,17.685 22.914,17.726 22.955,17.779 22.98,17.841 22.989,17.907 22.989,23.874 33.147,23.874 33.213,23.883 33.275,23.908 33.328,23.949 33.369,24.002 33.394,24.064 33.403,24.13 33.403,34.544 33.403,37.338 33.394,37.404 33.369,37.466 33.328,37.519 33.275,37.56 33.213,37.585 33.147,37.594 21.719,37.594 21.719,55.116 57.021,55.116
+3.3V on VCC (split plane): 32.891,24.386 22.733,24.386 22.667,24.377 22.605,24.352 22.552,24.311 22.511,24.258 22.486,24.196 22.477,24.13 22.477,18.163 16.385,18.163 16.385,32.914 17.326,33.855 17.367,33.908 17.385,33.952 17.392,33.97 17.401,34.036 17.401,34.288 32.891,34.288
+5V on VCC (split plane): 21.207,37.338 21.216,37.272 21.241,37.21 21.282,37.157 21.335,37.116 21.397,37.091 21.463,37.082 32.891,37.082 32.891,34.8 17.401,34.8 17.401,42.037 17.392,42.103 17.367,42.165 17.326,42.218 17.273,42.259 17.211,42.284 17.145,42.293 1.122,42.293 0.51,42.905 0.51,55.116 21.207,55.116
GND on GND (split plane): 57.021,0.51 0.51,0.51 0.51,55.116 57.021,55.116

## Keep-outs
Keep-Out Layer:
  the board outline again, w1

## Other copper
Top Layer:
  region net +5V: 8.636,43.815 12.954,43.815 12.954,47.117 20.574,47.117 20.574,45.974 21.336,45.974 21.336,45.593 21.082,45.593 14.732,45.593 14.732,42.291 8.636,42.291
  region net +3.3V: 25.908,33.274 28.702,33.274 28.702,32.766 33.147,32.766 33.147,31.623 33.274,31.496 29.464,31.496 29.464,32.258 25.908,32.258
  region net +12V: 26.289,47.752 26.289,44.323 28.575,44.323 28.575,47.752
  region net NetC1_1: 23.495,47.498 22.098,47.498 22.098,50.038 28.194,50.038 28.194,48.895 23.495,48.895
  region net NetD1_2: 22.225,45.974 23.495,45.974 23.495,45.466 25.019,45.466 25.019,44.577 24.384,44.577 24.384,41.656 22.606,41.656 22.606,43.561 23.876,43.561 23.876,45.212 22.225,45.212
GND (plane layer: these items are gaps in the copper):
  text "NEGATIVE \"PLANE LAYER\"" at 59.944,2.166 h8
VCC (plane layer: these items are gaps in the copper):
  lines w0.508: 0,43.053 1.016,42.037 17.145,42.037 17.145,34.544 ; 21.463,55.753 21.463,37.338 33.147,37.338 33.147,34.544 ; 17.145,34.544 17.145,34.036 16.129,33.02 16.129,17.907 22.733,17.907 22.733,24.13 33.147,24.13 33.147,34.544 ; 17.145,34.544 33.147,34.544
  text "NEGATIVE \"PLANE LAYER\"" at 59.944,39.25 h8

## Silkscreen, mask and mechanical layers (free items; w line width, h text height)
Top Overlay:
  drawing of 53 lines, arcs and shapes, not listed
  text "Grove 0-10V Board" at 1.905,52.197 h2
  text "GP8403 Supported" at 1.905,50.546 h2
  text "GND" at 54.031,48.006 h2 r90
  text "VOUT0" at 38.156,46.863 h2 r90
  text "GND" at 12.319,44.521 h2
  text "+5v" at 12.573,42.743 h2
  text "SDA" at 12.446,40.584 h2
  text "GND" at 54.158,38.989 h2 r90
  text "SCL" at 12.573,38.552 h2
  text "VOUT0" at 38.41,37.973 h2 r90
  text "GND" at 54.412,29.845 h2 r90
  text "VOUT0" at 38.664,28.956 h2 r90
  text "GND" at 54.666,21.336 h2 r90
  text "VOUT1" at 38.537,20.701 h2 r90
  text "GND" at 54.793,12.446 h2 r90
  text "VOUT1" at 38.664,12.065 h2 r90
  text "A0" at 21.971,8.268 h1.65
  text "A1" at 21.971,6.919 h1.65
  text "A2" at 21.971,5.545 h1.65
  text "GND" at 54.666,3.683 h2 r90
  text "VOUT1" at 38.537,3.175 h2 r90
  text "1" at 26.162,3.132 h2
  text "0" at 31.75,3.119 h2
Bottom Overlay:
  lines w0.508: 9.525,16.002 12.065,13.462 17.399,13.462 ; 9.525,22.479 12.065,25.019 17.272,25.019 ; 10.053,20.336 12.45,22.733 17.145,22.733 ; 13.335,16.002 17.272,16.002 ; 13.335,18.161 17.145,18.161 ; 13.335,20.193 17.145,20.193
  text "PIN_1" at 52.07,48.322 h2
  text "PIN_2" at 52.197,39.421 h2
  text "PIN_3" at 52.578,30.404 h2
  text "PIN_1" at 22.098,24.054 h2
  text "PIN_3" at 22.098,21.768 h2
  text "PIN_4" at 52.832,21.641 h2
  text "PIN_2" at 22.065,19.228 h2
  text "PIN_4" at 22.098,17.196 h2
  text "PIN_6" at 22.098,14.91 h2
  text "PIN_5" at 52.832,12.891 h2
  text "PIN_5" at 22.098,12.497 h2
  text "PIN_6" at 52.832,4.369 h2